# Altium PCB Final_PCB.PcbDoc (part 1 of 2)
Units mm, origin at the board's own origin, x right, y up, seen from the top; angles counter-clockwise.
Board outline 88.27 x 49.85 mm, 2 copper layers (Top Layer, Bottom Layer); 47 components, 63 nets, 231 pads, 57 vias.
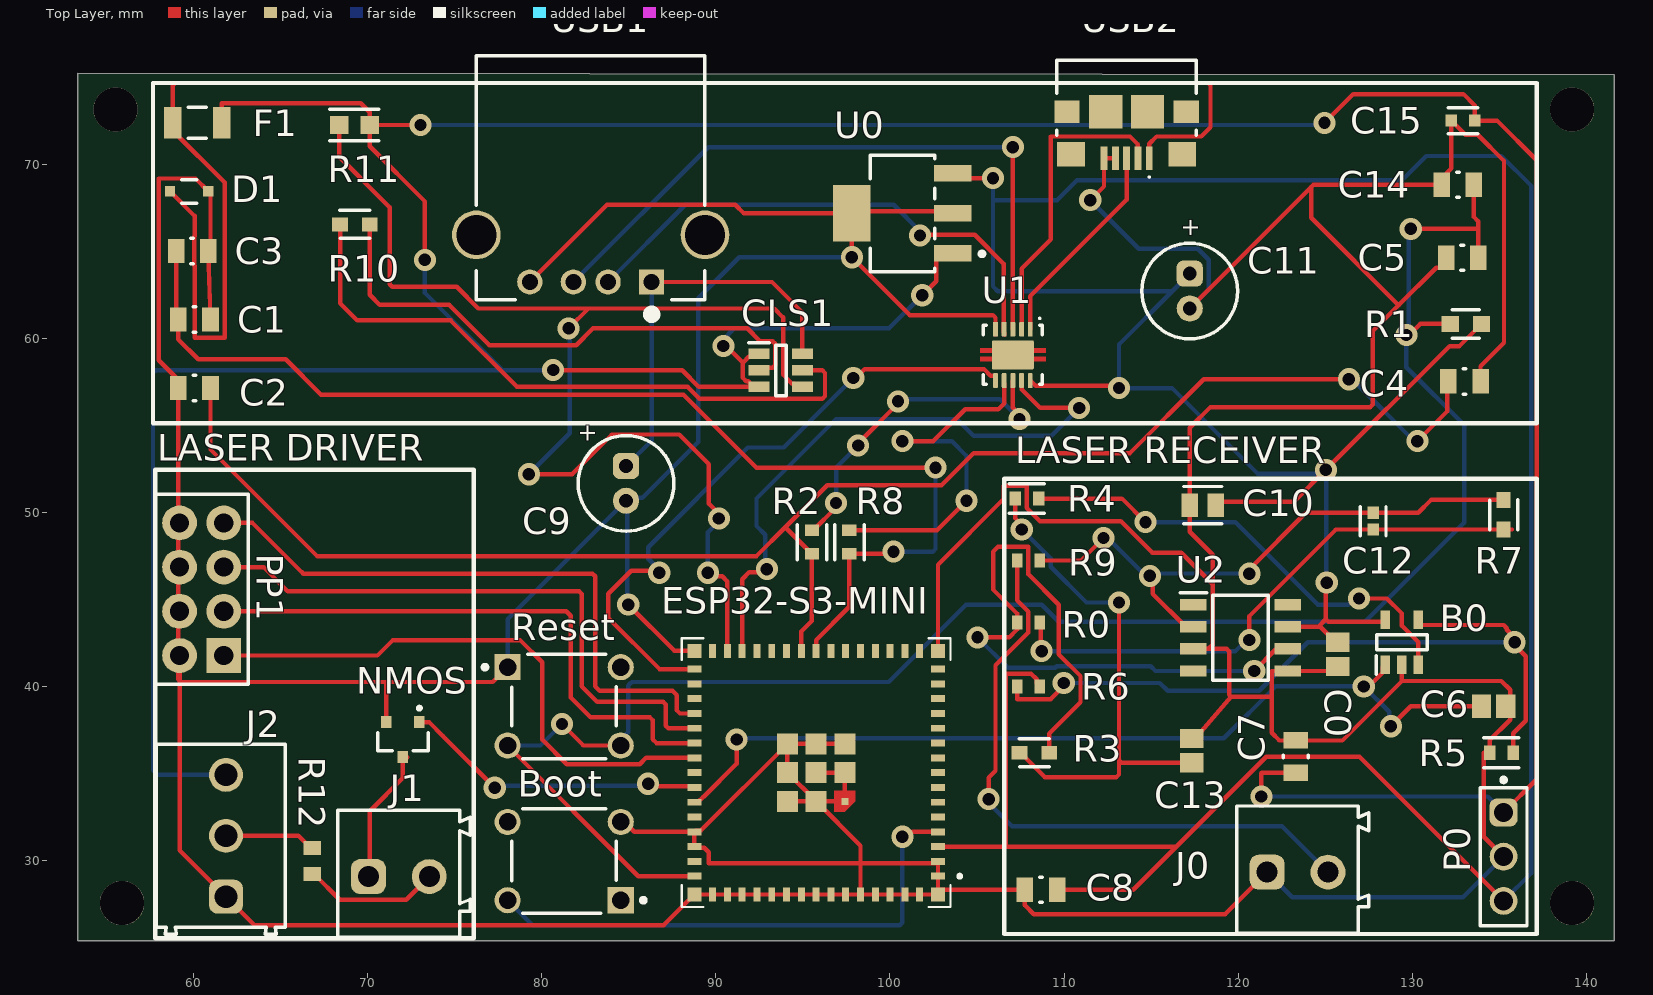
[diagram p0: Top Layer view]
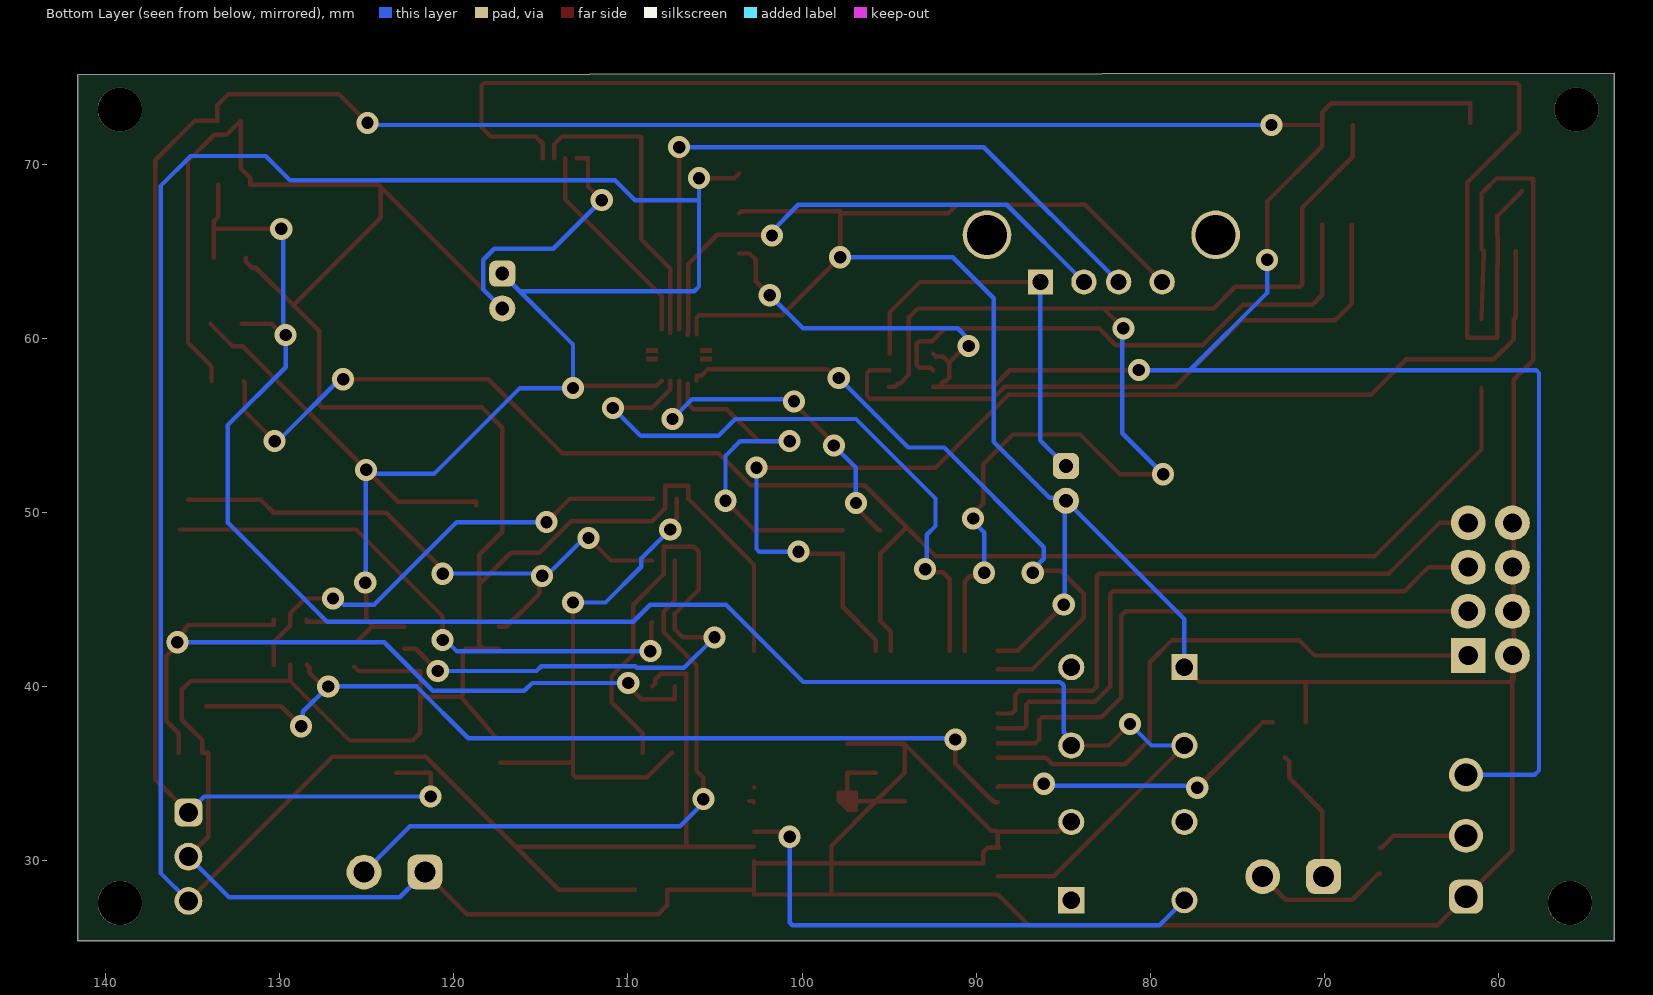
[diagram p1: Bottom Layer view, seen from below]
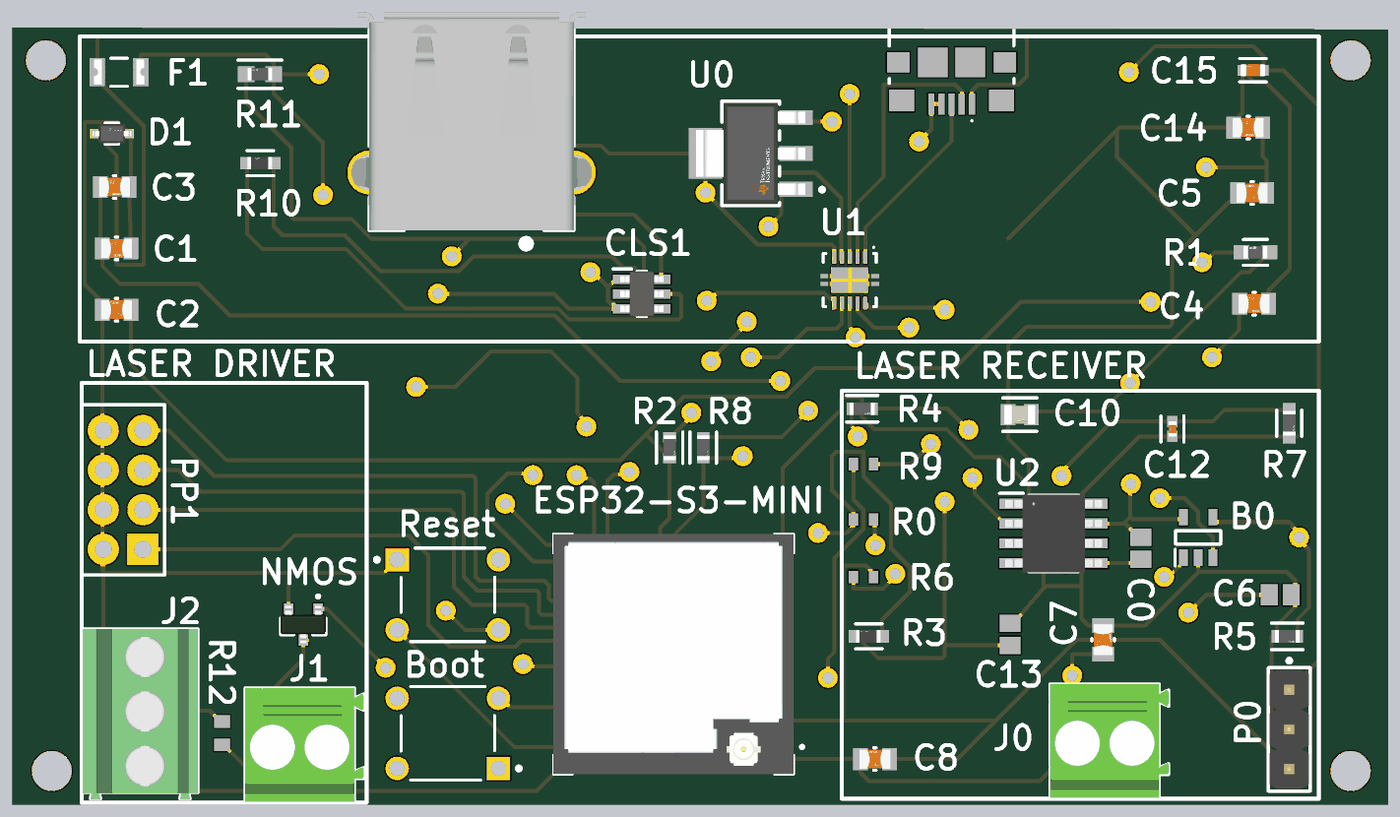
[diagram p2: 3D render of the assembled board from above, using the file's embedded part models]

## Layer stack, top to bottom
Top Solder: solder mask 0.0102, Solder Resist, Dk 3.5
Top Layer: signal copper 0.0356
Dielectric 1: dielectric 0.32, FR-4, Dk 4.8
Bottom Layer: signal copper 0.0356
Bottom Solder: solder mask 0.0102, Solder Resist, Dk 3.5

## Board outline
53.34,75.25 53.34,25.4 141.605,25.4 141.605,75.138

## Design rules (kind name [scope] priority, off if disabled: settings)
BoardOutlineClearance [All] p1 off: gap=0.2 ignorepadtopadclearanceinfootprint=FALSE
Clearance Clearance_1 [All] p1: gap=0.2 ignorepadtopadclearanceinfootprint=FALSE
Clearance "Min Clearance" [All] p2: gap=0.1 ignorepadtopadclearanceinfootprint=TRUE
DiffPairsRouting [All] p1: maxlimit=0.254 minlimit=0.2 mostfreqgap=0.254 toplayer_minwidth=0.254 toplayer_maxwidth=0.254 toplayer_prefwidth=0.254 bottomlayer_minwidth=0.254 bottomlayer_maxwidth=0.254 bottomlayer_prefwidth=0.254 maxuncoupledlength=12.7
HoleToHoleClearance [All] p1: gap=0.2 allowstackedmicrovias=TRUE
MinimumSolderMaskSliver [All] p1: minsoldermaskwidth=0.07
PolygonConnect [All] p1: connectstyle=Relief reliefconductorwidth=0.254 reliefentries=4 polygonreliefangle="90 Angle" airgapwidth=0.254
RoutingVias [All] p1: holewidth=0.711 width=1.27 viastyle="Through Hole" minholewidth=0.2 minwidth=0.25 maxholewidth=0.711 maxwidth=1.27
SilkToSilkClearance [All] p1: silktosilkclearance=0.1
SilkToSolderMaskClearance [IsPad] p1: minsilkscreentomaskgap=0.07 clearancetoexposedcopper=FALSE
SolderMaskExpansion [All] p1: expansion=0.102 istentingtop=FALSE
SupplyNets "Schematic Supply Nets_2" [InNet('5V')] p1: voltage=0.000
SupplyNets "Schematic Supply Nets_1" [InNet('GND')] p2: voltage=0.000
SupplyNets "Schematic Supply Nets" [InNet('3.3V')] p3: voltage=0.000
Width [All] p1: maxlimit=0.254 minlimit=0.1 preferedwidth=0.254 minimp=50.000000 maximp=50.000000 favimp=50.000000
25 further rules are at their usual default settings.

## Classes and differential pairs
component class "USB Schematic": C7 C8 C9 C11 C15 CLS1 D1 F1 R2 R8 R10 R11 U0 U1 USB1 USB2
component class "MCU Schematic": Boot C1 C2 C3 C4 C5 C14 ESP32-S3-MINI P0 PP1 R1 Reset
component class "Laser Schematic": B0 C0 C6 C10 C12 C13 J0 J1 J2 NMOS OPV310 R0 R3 R4 R5 R6 R7 R9 R12 U2
differential pair USB_D: +USB_D_P -USB_D_N
differential pair USB1_D: +USB1_D_P -USB1_D_N
differential pair USB0_D: +USB0_D_P -USB0_D_N

## Components (designator, comment, footprint, x,y, rotation, side; value= is the part's Value field where it differs from the comment)
B0 "LTC6752IS5#TRMPBF" SOT95P280X100-5N 129.413,42.545 r90 top
Boot "B3F-1000" OMRON-B3F-1000-4_V 81.28,29.972 r180 top (schematic designator BOOT)
C0 "08055F103KAT2A" CAPC2013X140X50LL20T25 125.73,41.848 r270 top
C1 "CC0805KKX7R7BB105" FP-CC0805-0_85-MFG 60.035,61.087 r0 top value="1 uF"
C2 "CC0805KKX7R7BB105" FP-CC0805-0_85-MFG 60.035,57.15 r180 top value="1 uF"
C3 "CC0805KRX7R9BB104" FP-CC0805-0_85-MFG 59.908,65.024 r0 top value="100 nF"
C4 "CC0805KRX7R9BB104" FP-CC0805-0_85-MFG 133.005,57.531 r0 top value="100 nF"
C5 "CC0805KRX7R9BB104" FP-CC0805-0_85-MFG 132.878,64.643 r180 top value="100 nF"
C6 "08055C103KAT2A" CAPC2013X140X50LL20T25 134.682,38.862 r0 top
C7 "CC0805KRX7R9BB104" FP-CC0805-0_85-MFG 123.317,35.977 r90 top value="100 nF"
C8 "CC0805KRX7R9BB104" FP-CC0805-0_85-MFG 108.676,28.321 r180 top value="100 nF"
C9 "860160272010" WCAP-ATLL_D5H11 -1185.164,1321.673 r90 top
C10 "CL21C102JBCNNNC" FP-C0805C-DN-MFG 117.971,50.419 r180 top value="1,000 pF"
C11 "KS336M016C07RR0VH2FP0" WCAP-ATLL_D5H11 -1152.779,1332.722 r90 top
C12 "GJM1555C1H2R0WB01D" FP-GJM155-0_05-IPC_A 127.762,49.501 r270 top
C13 "08055C103KAT2A" CAPC2013X140X50LL20T25 117.348,36.322 r270 top
C14 "CC0805KRX7R9BB104" FP-CC0805-0_85-MFG 132.624,68.834 r0 top value="100 nF"
C15 "CL10B474KA8NNNC" FP-GRM188-0_1-e0_2_0_5-MFG 132.929,72.517 r180 top
CLS1 "TPS2553DBVR" SOT95P280X145-6N 93.726,58.166 r0 top
D1 "PESD5V0S1BA,115" FP-SOD323-CA-MFG 59.733,68.453 r0 top
ESP32-S3-MINI "ESP32-S3-MINI-1U-N8" XCVR_ESP32-S3-MINI-1U-N8 95.757,35.053 r180 top
F1 "1206L050/15YR" FP-1206L-MFG 60.195,72.39 r180 top value=0.15-0.75Ω
J0 "691214110002S" 691214110002S 123.416,29.487 r0 top
J1 "691214110002S" 691214110002S 71.783,29.233 r0 top
J2 "691214110003" 691214110003 61.549,31.425 r90 top
NMOS "2N7002BK" TL431CDBZR215 72.009,36.957 r180 top
P0 "61300311121" 61300311121 135.255,30.226 r270 top
PP1 "C18723055" 2541FV-2×4P 61.722,41.783 r180 top
R0 "RC0603FR-1022RL" RESC1608X55X25LL10T15 107.95,43.688 r0 top
R1 "RN73C1J10KB" FP-RN731J-MFG 133.085,60.833 r180 top value=10KΩ
R2 "RC0603JR-0722RL" FP-RC0603-0_55-IPC_C 95.509,48.302 r270 top
R3 "RT0603BRE07200RL" FP-RT0603-MFG 108.292,36.195 r180 top value=200Ω
R4 "AC0603FR-101KL" FP-AC0603-IPC_C 107.865,50.8 r0 top
R5 "AC0603FR-101KL" FP-AC0603-IPC_C 135.128,36.195 r0 top
R6 "RC0603JR-1010KL" RESC1608X55X25LL10T15 107.95,40.005 r0 top
R7 "RT0603BRD0750KL" FP-RT0603-0_55-MFG 135.255,49.872 r270 top
R8 "RC0603JR-0722RL" FP-RC0603-0_55-IPC_C 97.663,48.302 r270 top
R9 "RC0603JR-07220RL" RESC1608X55X25LL10T15 107.95,47.244 r0 top
R10 "RCT0320KJLF" FP-RT0603-MFG 69.254,66.548 r180 top value=20KΩ
R11 "RCT03100KJLF" FP-AT0603-IPC_A 69.227,72.263 r180 top
R12 "RC0603FR-07560RL" RESC1608X55X25ML10T15 66.802,29.984 r90 top
Reset "B3F-1000" OMRON-B3F-1000-4_V 81.28,38.862 r0 top (schematic designator RESET)
U0 "LM3940IMPX-3.3/NOPB" FP-DCY0004A-MFG 100.711,67.183 r180 top
U1 "TS3USB221DRCR" DRC0010J_V 107.061,59.055 r270 top
U2 "LTC6268IS8-10#TRPBF" SOIC127P599X175-8N 120.142,42.799 r0 top
USB1 "292303-1" TE-292303-1_V 82.804,64.389 r180 top
USB2 "1981568-1" TECO-1981568-5_V 113.595,70.35 r180 top

## Footprints (in the part's own frame and the unit in brackets; to place one, negate y for a bottom-side part, rotate by r counter-clockwise, add the part's x,y. Pads: shape width x height; smd on the part's side, far side on the other; paste and mask are expansions set on the pad)
2541FV-2×4P [mm]
  rect 2x2 hole 1.1: 1(0,0)
  round 2 hole 1.1: 2(2.54,0) 3(0,-2.54) 4(2.54,-2.54) 5(0,-5.08) 6(2.54,-5.08) 7(0,-7.62) 8(2.54,-7.62)
  silkscreen extent -1.4,-9.27 3.94,1.65, body extent -1.4,-9.27 3.94,1.65, height 8.7
61300311121 [mm] "Pin Header, pitch 2.54 mm, THT, Vertical, single row, 3p"
  rrect50% 1.6x1.6 hole 1.1: 1(-2.54,0)
  round 1.6 hole 1.1: 2(0,0) 3(2.54,0)
  silkscreen extent -4.53,-1.34 3.96,1.34, body extent -3.81,-1.27 3.81,1.27, height 8.57
691214110002S [mm] "Serie 2141S - 3.50 mm _ 2 pins"
  rrect50% 2x2 hole 1.2: 1(-1.75,-0.15)
  round 2 hole 1.2: 2(1.75,-0.15)
  silkscreen extent -3.5,-3.65 4.1,3.65, body extent -3.5,-3.65 4.1,3.65, height 9.15
691214110003 [mm] "3.50 mm Horizontal Entry Modular, 3p"
  rrect50% 1.95x1.95 hole 1.3: 1(-3.5,-0.3)
  round 1.95 hole 1.3: 2(0,-0.3) 3(3.5,-0.3)
  silkscreen extent -5.65,-3.7 5.25,3.7, body extent -5.7,-3.7 5.25,3.7, height 8.55
CAPC2013X140X50LL20T25 [mm] "Chip Capacitor, 2-Leads, Body 2.00x1.25mm, IPC High Density"
  rect 1.1x1.35 smd: 1(-0.7,0) 2(0.7,0)
  body extent -1.1,-0.72 1.1,0.72, height 1.4
DRC0010J_V [mm] "SON, 10-Leads, Body 3x3mm, Pitch 0.5mm, Thermal Pad 2.4x1.65mm, TI Recommended"
  rrect36% 0.85x0.28 smd paste-0.025 mask+0.07: 1(-1.475,1) 2(-1.475,0.5) 3(-1.475,0) 4(-1.475,-0.5) 5(-1.475,-1) 6(1.475,-1) 7(1.475,-0.5) 8(1.475,0) 9(1.475,0.5) 10(1.475,1)
  rrect6% 1.65x2.4 smd paste-0.825 mask+0.07: 11(0,0)
  Top Layer region: -0.394,-1.9 -0.114,-1.9 -0.114,-1.2 -0.394,-1.2
  Top Layer region: 0.386,-1.2 0.106,-1.2 0.106,-1.9 0.386,-1.9
  Top Layer region: 0.386,1.9 0.106,1.9 0.106,1.2 0.386,1.2
  Top Layer region: -0.394,1.2 -0.114,1.2 -0.114,1.9 -0.394,1.9
  silkscreen extent -2.15,-1.7 1.7,1.7, body extent -1.55,-1.55 1.55,1.55, height 1
FP-1206L-MFG [mm]
  rect 1x1.8 smd paste+0 mask+0: 1(-1.4,0) 2(1.4,0)
  silkscreen extent -0.53,-0.9 0.53,0.9, body extent -2,-1 2,1, height 0.25
FP-AC0603-IPC_C [mm]
  rect 0.659x0.812 smd paste+0 mask+0: 1(-0.677,0) 2(0.677,0)
  silkscreen extent -1.01,-0.85 1.01,0.85, body extent -1.11,-0.55 1.11,0.55, height 0.25
FP-AT0603-IPC_A [mm]
  rect 1.059x1.012 smd paste+0 mask+0: 1(-0.877,0) 2(0.877,0)
  silkscreen extent -1.41,-0.91 1.41,0.91, body extent -1.91,-1.01 1.91,1.01, height 0.25
FP-C0805C-DN-MFG [mm]
  rect 0.95x1.35 smd paste+0 mask+0: 1(-0.75,0) 2(0.75,0)
  silkscreen extent -1.1,-1.07 1.1,1.07, body extent -1.4,-0.85 1.4,0.85, height 0.25
FP-CC0805-0_85-MFG [mm]
  rect 0.95x1.4 smd paste+0 mask+0: 1(-0.925,0) 2(0.925,0)
  silkscreen extent -0.07,-0.73 0.08,0.73, body extent -1.6,-1.05 1.6,1.05, height 0.25
FP-DCY0004A-MFG [mm]
  rect 2.15x0.95 smd paste+0 mask+0: 1(-2.9,2.3) 2(-2.9,0) 3(-2.9,-2.3)
  rect 2.15x3.25 smd paste+0 mask+0: 4(2.9,0)
  silkscreen extent -4.7,-3.35 1.85,3.35, body extent -4.08,-3.45 4.08,3.45, height 0.25
FP-GJM155-0_05-IPC_A [mm]
  rect 0.715x0.672 smd paste+0 mask+0: 1(-0.479,0) 2(0.479,0)
  silkscreen extent -0.84,-0.74 0.84,0.74, body extent -1.04,-0.54 1.04,0.54, height 0.25
FP-GRM188-0_1-e0_2_0_5-MFG [mm]
  rect 0.65x0.7 smd paste+0 mask+0: 1(-0.675,0) 2(0.675,0)
  silkscreen extent -0.85,-0.75 0.85,0.75, body extent -1.1,-0.55 1.1,0.55, height 0.25
FP-RC0603-0_55-IPC_C [mm]
  rect 0.659x0.812 smd paste+0 mask+0: 1(-0.677,0) 2(0.677,0)
  silkscreen extent -1.01,-0.85 1.01,0.85, body extent -1.11,-0.55 1.11,0.55, height 0.25
FP-RN731J-MFG [mm]
  rect 1x0.9 smd paste+0 mask+0: 1(-0.9,0) 2(0.9,0)
  silkscreen extent -0.78,-0.82 0.77,0.82, body extent -1.5,-0.55 1.5,0.55, height 0.25
FP-RT0603-0_55-MFG [mm]
  rect 0.9x0.8 smd paste+0 mask+0: 1(-0.85,0) 2(0.85,0)
  silkscreen extent -0.85,-0.81 0.86,0.8, body extent -1.4,-0.55 1.4,0.55, height 0.25
FP-RT0603-MFG [mm]
  rect 0.9x0.8 smd paste+0 mask+0: 1(-0.85,0) 2(0.85,0)
  silkscreen extent -0.85,-0.81 0.86,0.8, body extent -1.4,-0.55 1.4,0.55, height 0.25
FP-SOD323-CA-MFG [mm]
  rect 0.6x0.6 smd paste-1000 mask+0: 1(-1.1,0) 2(1.1,0)
  silkscreen extent -0.43,-0.67 0.43,0.67, body extent -1.53,-0.82 1.53,0.82, height 0.25
OMRON-B3F-1000-4_V [mm] "TH, 4-Leads, Body 6x6mm"
  rect 1.5x1.5 hole 1 paste-2539.97: 1(-3.25,2.25)
  round 1.5 hole 1 paste-2539.97: 2(3.25,2.25) 4(3.25,-2.25)
  round 1.5 hole 1 paste-2539.97 mask+0.102: 3(-3.25,-2.25)
  silkscreen extent -4.68,-3 3,3, body extent -3,-3 3,3, height 4.5
RESC1608X55X25LL10T15 [mm] "Chip Resistor, 2-Leads, Body 1.60x0.80mm, IPC High Density"
  rect 0.6x0.8 smd: 1(-0.65,0) 2(0.65,0)
  body extent -0.85,-0.45 0.85,0.45, height 0.55
RESC1608X55X25ML10T15 [mm] "Chip Resistor, 2-Leads, Body 1.70x0.90mm, IPC Low Density"
  rect 0.8x1 smd: 1(-0.75,0) 2(0.75,0)
  body extent -0.85,-0.45 0.85,0.45, height 0.55
SOIC127P599X175-8N [mm]
  rect 1.526x0.65 smd: 1(-2.712,1.905) 2(-2.712,0.635) 3(-2.712,-0.635) 4(-2.712,-1.905) 5(2.712,-1.905) 6(2.712,-0.635) 7(2.712,0.635) 8(2.712,1.905)
  silkscreen extent -3.48,-2.45 1.6,2.58, body extent -3.1,-2.5 3.1,2.5, height 1.76
SOT95P280X100-5N [mm]
  rect 1.05x0.55 smd: 1(-1.3,0.95) 2(-1.3,0) 3(-1.3,-0.95) 4(1.3,-0.95) 5(1.3,0.95)
  silkscreen extent -1.82,-1.45 0.42,1.47
SOT95P280X145-6N [mm]
  rect 1.2x0.6 smd: 1(-1.25,0.95) 2(-1.25,0) 3(-1.25,-0.95) 4(1.25,-0.95) 5(1.25,0) 6(1.25,0.95)
  silkscreen extent -1.85,-1.45 0.3,1.6, body extent -1.4,-1.45 1.4,1.45, height 1.2
TE-292303-1_V [mm] "THD, 4-Leads, Body 13.13x14mm, Pitch 2.5mm"
  rect 1.45x1.45 hole 0.92: 1(-3.5,1.144)
  round 1.45 hole 0.92: 2(-1,1.144) 3(1,1.144) 4(3.5,1.144)
  round 2.8 hole 2.3: 5(-6.57,-1.566) 6(6.57,-1.566)
  silkscreen extent -6.56,-11.85 6.56,3.25, body extent -8.12,-11.85 8.12,2.15, height 7.72
TECO-1981568-5_V [mm] "SMD, 5-Leads, Body 8x5.9mm, Pitch 0.65mm"
  rect 0.4x1.35 smd: 1(-1.3,0) 2(-0.65,0) 3(0,0) 4(0.65,0) 5(1.3,0)
  rect 1.6x1.4 smd: 6(-3.2,-0.225) 7(3.2,-0.225)
  rect 1.45x1.3 smd: 8(-3.425,-2.675) 9(3.425,-2.675)
  rect 1.9x1.9 smd: 10(-1.2,-2.675) 11(1.2,-2.675)
  silkscreen extent -4,-5.63 4,1.12, body extent -4,-5.63 4,0.28, height 3
TL431CDBZR215 [mm]
  rect 0.6x0.7 smd: 1(-0.95,-1) 2(0.95,-1) 3(0,1)
  silkscreen extent -1.45,-1.9 1.45,0.65, body extent -1.45,-1.2 1.45,1.2, height 0.95
WCAP-ATLL_D5H11 [mm] "Aluminum Electrolytic Capacitors, 5x11mm"
  rrect50% 1.5x1.5 hole 0.8: 1(-1269,-1270)
  round 1.5 hole 0.8: 2(-1271,-1270)
  silkscreen extent -1272.75,-1272.75 -1267.25,-1267.25, body extent -1272.49,-1272.5 -1267.5,-1267.5, height 11.31
XCVR_ESP32-S3-MINI-1U-N8 [mm]
  rect 0.8x0.4 smd: 1(-7,5.95) 2(-7,5.1) 3(-7,4.25) 4(-7,3.4) 5(-7,2.55) 6(-7,1.7) 7(-7,0.85) 8(-7,0) 9(-7,-0.85) 10(-7,-1.7) 11(-7,-2.55) 12(-7,-3.4) 13(-7,-4.25) 14(-7,-5.1) 15(-7,-5.95) 31(7,-5.95) 32(7,-5.1) 33(7,-4.25) 34(7,-3.4) 35(7,-2.55) 36(7,-1.7) 37(7,-0.85) 38(7,0) 39(7,0.85) 40(7,1.7) 41(7,2.55) 42(7,3.4) 43(7,4.25) 44(7,5.1) 45(7,5.95)
  rect 0.4x0.8 smd: 16(-5.95,-7) 17(-5.1,-7) 18(-4.25,-7) 19(-3.4,-7) 20(-2.55,-7) 21(-1.7,-7) 22(-0.85,-7) 23(0,-7) 24(0.85,-7) 25(1.7,-7) 26(2.55,-7) 27(3.4,-7) 28(4.25,-7) 29(5.1,-7) 30(5.95,-7) 46(5.95,7) 47(5.1,7) 48(4.25,7) 49(3.4,7) 50(2.55,7) 51(1.7,7) 52(0.85,7) 53(0,7) 54(-0.85,7) 55(-1.7,7) 56(-2.55,7) 57(-3.4,7) 58(-4.25,7) 59(-5.1,7) 60(-5.95,7)
  rect 0.4x0.4 smd paste-1 mask+0: 61_1(-1.65,1.65)
  rect 1.2x1.2 smd: 61_2(0,1.65) 61_3(1.65,1.65) 61_4(-1.65,0) 61_5(0,0) 61_6(1.65,0) 61_7(-1.65,-1.65) 61_8(0,-1.65) 61_9(1.65,-1.65)
  rect 0.8x0.8 smd: 62(-7,7) 63(-7,-7) 64(7,-7) 65(7,7)
  round 0 all layers, no hole mask+0: 66_1(-0.825,1.65) 66_2(0.825,1.65) 66_3(-1.65,0.825) 66_4(0,0.825) 66_5(1.65,0.825) 66_6(-0.825,0) 66_7(0.825,0) 66_8(-1.65,-0.825) 66_9(0,-0.825) 66_10(1.65,-0.825) 66_11(-0.825,-1.65) 66_12(0.825,-1.65)
  Top Layer region: -1.05,1.05 -2.25,1.05 -2.25,1.65 -1.65,2.25 -1.05,2.25
  silkscreen extent -8.35,-7.72 7.72,7.72, body extent -7.7,-7.7 7.7,7.7, height 2.55

## Part data
B0: "LINEAR TECHNOLOGY - LTC6752IS5#TRMPBF - Analogue Comparator, Single, High Speed, 1 Comparator, 3.4 ns, 2.45V to 3.5V, TSOT-23, 5 Pins", Manufacturer_Name="Analog Devices", Mouser Part Number=584-LTC6752IS5TRMPBF, Datasheet Link=https://datasheet.datasheetarchive.com/originals/distributors/DKDS-14/269585.pdf, Geometry.Height=1mm, Manufacturer_Part_Number=LTC6752IS5#TRMPBF, Mouser Price/Stock=https://www.mouser.co.uk/ProductDetail/Analog-Devices/LTC6752IS5TRMPBF?qs=hVkxg5c3xu9c5xiGZDI2qQ%3D%3D
Boot Reset: library part CMP-1677-00002-1, "Tactile Switch, SPST-NO, 0.05 A, 5 to 24 V, -25 to 70 degC, 4-Pin THD, RoHS, Bulk", Capacitance="-45 f", Current Rating="1.5 A", Max Operating Temperature="70 degC", Min Operating Temperature="-40 degC", Package Quantity=1080, Voltage Rating="150 V", ComponentLink1Description="Manufacturer URL", ComponentLink1URL=http://www.omron.com/, ComponentLink2Description=Datasheet, ComponentLink2URL=http://www.omron.com/ecb/products/pdf/en-b3f.pdf, Contact Material=Brass, Contact Plating=Gold, DatasheetVersion=Jan-15, Gender=Female, Height="14.99 mm", Lead Pitch="1.27 mm", Length="18.34 mm", Mount="Through Hole", PackageDescription="4-Pin Through Hole Device, Body 6 x 6 mm", PackageReference=B3F-1000, Packaging=Tray, Pins=8, Radiation Hardening=No, RoHSCompliant=true, Shielding=Shielded, Width="25.4 mm"
C0: library part CMP-2007-04788-1, Manufacturer="AVX Interconnect / Elco", Part Number=08055F103KAT2A
C1 C2: library part CMP-03422-000001-1, "CAP CER 1UF 16V X7R 0805", Capacitance="1 uF", Manufacturer=Yageo, Package=CC0805-0.85, Temperature="-30°C to +85°C", Temperature Characteristic=X7R, Temperature Range High=+85°C, Temperature Range Low=-30°C, Tolerance=0.1, Voltage Rating="16 V", Automotive=No, Category=Cap, ComponentLink2Description=Datasheet, ComponentLink2URL=http://www.yageo.com/documents/recent/UPY-GPHC_Y5V_6.3V-to-50V_8.pdf, Device Class L1="Passive Components", Device Class L2=Capacitors, Device Class L3="Ceramic Capacitors", Digikey Description="CAP CER 1UF 16V X7R 0805", Footprint Url=http://www.yageo.com/exep/pages/download/literatures/UPY-C_GEN_24.pdf, Height=0.95mm, Ipc Land Pattern Name=CAPC200125X85, Lead Free=Yes, Manufacturer Part Number=CC0805KKX7R7BB105, Material=Ceramic, Mouser Description="Multilayer Ceramic Capacitors MLCC - SMD/SMT 1.0uF 16V X7R 10%", Octopart=https://octopart.com/cc0805kkx7r7bb105-yageo-8376555, RoHS=TRUE
C3 C4 C5 C7 C8 C14: library part CMP-2100-03606-3, "CAP CER 0.1UF 50V X7R 0805", Capacitance="100 nF", Manufacturer=Yageo, Package=CC0805-0.85, Temperature="-30°C to +85°C", Temperature Characteristic=X7R, Temperature Range High=+85°C, Temperature Range Low=-30°C, Tolerance=0.1, Voltage Rating="50 V", Automotive=No, Category=Cap, ComponentLink2Description=Datasheet, ComponentLink2URL=http://www.yageo.com/documents/recent/UPY-GPHC_Y5V_6.3V-to-50V_8.pdf, Device Class L1="Passive Components", Device Class L2=Capacitors, Device Class L3="Ceramic Capacitors", Digikey Description="CAP CER 0.1UF 50V X7R 0805", Footprint Url=http://www.yageo.com/exep/pages/download/literatures/UPY-C_GEN_24.pdf, Height=0.95mm, Ipc Land Pattern Name=CAPC200125X85, Lead Free=Yes, Manufacturer Part Number=CC0805KRX7R9BB104, Material=Ceramic, Mouser Description="Multilayer Ceramic Capacitors MLCC - SMD/SMT 100nF 50V X7R 10%", Octopart=https://octopart.com/cc0805krx7r9bb104-yageo-192993, RoHS=TRUE
C6 C13: library part CMP-2007-04788-1, Manufacturer="AVX Interconnect / Elco", Part Number=08055F103KAT2A
C9: library part CMP-03913-54007380-1, "860160272010 Cap, 120Uf, 10V, Alu Elec, Radial Rohs Compliant: Yes", Capacitance=120µF, Case/Package=Radial, Leakage Current=12µA, Max Operating Temperature=105°C, Min Operating Temperature=-55°C, Ripple Current=246mA, Tolerance=20%, Voltage Rating=10V, Diameter=5mm, Height - Seated (Max)=12.4968mm, Impedance=1.02Ω, Lead Pitch=2.0066mm, Length=11mm, Life (Hours)=3000hours, Mount="Through Hole", NexarPartId=54007380, Packaging="Tape & Box (TB)", Pitch=2mm, Polarity=Polar, RoHS=Compliant
C10: library part CMP-03020-033764-1, "C0805 1,000 pF X7R 30ppm/°C 5.00% 50 V", Capacitance="1,000 pF", Manufacturer=KEMET, Manufacturer Part Number=C0805C102J5RAC, Package=C0805C-DN, Temperature="-55°C to +125°C", Temperature Characteristic=X7R, Temperature Coefficient=30ppm/°C, Temperature Range High=+125°C, Temperature Range Low=-55°C, Tolerance=0.05, Voltage Rating="50 V", Automotive=No, Category=Cap, ComponentLink2Description=Datasheet, ComponentLink2URL=https://content.kemet.com/datasheets/KEM_C1003_C0G_SMD.pdf, Device Class L1="Passive Components", Device Class L2=Capacitors, Device Class L3="Ceramic Capacitors", Height=0.88mm, Ipc Land Pattern Name=CAPC200125X78, Lead Free=Yes, Material=Ceramic, Mouser Description="Multilayer Ceramic Capacitors MLCC - SMD/SMT 50volts 1000pF 5% X7R", Octopart=https://octopart.com/c0805c102j5rac-kemet-1343162, RoHS=TRUE
C11: library part CMP-03913-54007416-1, "860160372005 Aluminium Electrolytic Capacitor-Leaded Rohs Compliant: Yes", Capacitance=33µF, Case/Package=Radial, Leakage Current=5.28µA, Max Operating Temperature=105°C, Min Operating Temperature=-55°C, Ripple Current=144mA, Tolerance=20%, Voltage Rating=16V, Diameter=5mm, Height - Seated (Max)=12.4968mm, Impedance=2Ω, Lead Pitch=2.0066mm, Length=11mm, Life (Hours)=4000hours, Mount="Through Hole", NexarPartId=54007416, Packaging="Tape & Box (TB)", Pitch=2mm, Polarity=Polar, RoHS=Compliant
C12: library part CMP-2008-03832-2, "Multi-Layer Ceramic Capacitor 2pF C0G  ±0.05pF 0402 Paper T/R", Capacitance=2pF, Case Code (Imperial)=0402, Case Code (Metric)=1005, Dielectric=C0G, Max Operating Temperature=125°C, Min Operating Temperature=-55°C, Package Quantity=10000, Voltage Rating=50V, Case/Package=0402, Depth=0.5mm, Height=0.5mm, Lead Free="Lead Free", Length=1mm, Mount="Surface Mount", Packaging="Tape and Reel", Radiation Hardening=No, Termination=SMD/SMT, Thickness=0.022inch, Voltage Rating (DC)=50V, Width=0.02inch
C15: library part CMP-2006-02563-2, "25V 470nF X7R ±10% 0603 Multilayer Ceramic Capacitors MLCC - SMD/SMT ROHS", Capacitance=470nF, Case Code (Imperial)=0603, Case Code (Metric)=1608, Dielectric=X7R, Max Operating Temperature=125°C, Min Operating Temperature=-55°C, Package Quantity=10000, Tolerance=10%, Voltage Rating=16V, Case/Package=0603, Depth=0.8mm, Height=0.8mm, Length=1.6mm, Mount="Surface Mount", Packaging="Tape and Reel", Radiation Hardening=No, Termination=SMD/SMT, Thickness=0.035inch, Voltage Rating (DC)=16V, Width=0.031inch
CLS1: "Integrated Circuit", Manufacturer_Name="Texas Instruments", Mouser Part Number=595-TPS2553DBVR, Arrow Part Number=TPS2553DBVR, Arrow Price/Stock=https://www.arrow.com/en/products/tps2553dbvr/texas-instruments?utm_currency=USD&region=europe, Datasheet Link=http://www.ti.com/lit/gpn/tps2553, Height=1.45mm, Manufacturer_Part_Number=TPS2553DBVR, Mouser Price/Stock=https://www.mouser.co.uk/ProductDetail/Texas-Instruments/TPS2553DBVR?qs=QZKT0uTfj2LY8QSfRgrLvA%3D%3D
D1: library part CMP-14432-000001-1, "TVS DIODE 5V 14V SOD323"
ESP32-S3-MINI: "Bluetooth, WiFi 802.11b/g/n, Bluetooth v5.0 Transceiver Module 2.4GHz Antenna Not Included, U.FL Surface Mount", Package="VFQFN-56 Espressif Systems", Check_prices=https://www.snapeda.com/parts/ESP32-S3-MINI-1U-N8/Espressif+Systems/view-part/?ref=eda, MF="Espressif Systems", MP=ESP32-S3-MINI-1U-N8, SnapEDA_Link=https://www.snapeda.com/parts/ESP32-S3-MINI-1U-N8/Espressif+Systems/view-part/?ref=snap
F1: library part CMP-08606-000030-1, "PTC RESET FUSE 15V 500MA 1206", Ambient Temperature Range High=+85°C, Ambient Temperature Range Low=-40°C, Current Rating=100A, Hold Current=0.5A, Manufacturer="Littelfuse Inc", Package=1206L, Resistance=0.15-0.75Ω, Temperature="-40°C to +85°C", Trip Current=1A, Voltage Rating=15V, Automotive=No, Category=Fuse, ComponentLink2Description=Datasheet, ComponentLink2URL=https://www.littelfuse.com/~/media/electronics/datasheets/resettable_ptcs/littelfuse_ptc_1206l_datasheet.pdf.pdf, Device Class L1="Circuit Protection", Device Class L2="PTC Resettable Fuses", Device Class L3=unset, Digikey Description="PTC RESET FUSE 15V 500MA 1206", Height=0.75mm, Lead Free=Yes, Manufacturer Part Number=1206L050/15YR, Mouser Description="Resettable Fuses - PPTC 15V 1206 .500A POLYFUSE", Octopart=https://octopart.com/1206l050%2F15yr-littelfuse-673645, RoHS=TRUE, Temperature Range High=+85°C, Temperature Range Low=-40°C, Trip Time=0.1s
J0 J1: library part CMP-1502-02465-2, Current Rating=10A, Max Operating Temperature=120°C, Min Operating Temperature=-30°C, Voltage Rating=300V, Contact Material="Nickel, Tin", Height=9.2mm, Lead Pitch=3.5mm, NexarPartId=94172715, Number of Contacts=2, Number of Pins=2, Number of Rows=1, Packaging=Box
J2: library part CMP-1502-02466-2, Color="Blue, Green", Current=10A, Max Operating Temperature=105°C, Min Operating Temperature=-40°C, Voltage=300V, Contact Material=Brass, Contact Plating="Brass, Tin", Current Rating=10A, Height=12.2mm, Housing Material=Nylon, Lead Pitch=3.5mm, Length=7.4mm, Mount="Through Hole", NexarPartId=18818289, Number of Contacts=3, Number of Levels=1, Number of Pins=3, Number of Positions Per Level=3, Packaging=Box, Pitch=3.5052mm, Plating="Brass, Steel", REACH SVHC=Unknown, RoHS=Compliant, Stripping Length=-6mm, Termination=Screw, Voltage Rating=300V, Width=10.9mm, Wire Gauge (Max)=24AWG, Wire Gauge (Min)=16AWG, Wire/Cable Gauge=24AWG
NMOS: "MOSFET (N-Channel)", Manufacturer_Name=Nexperia, Mouser Part Number=N/A, Datasheet Link=https://componentsearchengine.com/Datasheets/2/2N7002BK.pdf, Height=1.1mm, Manufacturer_Part_Number=2N7002BK, Mouser Price/Stock=https://www.mouser.co.uk/ProductDetail/Nexperia/2N7002BK?qs=vHuUswq2%252Bsy7zq%252BdG1DqyA%3D%3D
P0: library part CMP-1502-01062-3, Color=Black, Contact Resistance=20mΩ, Current Rating=3A, Max Operating Temperature=105°C, Min Operating Temperature=-40°C, Operating Supply Voltage=250V, Connector Type="Male Pin", Contact Material=Copper, Contact Mating Length=5.9944mm, Contact Plating=Gold, Gender=Male, Height=8.94mm, Lead Free="Lead Free", Lead Pitch=2.54mm, Mount="Through Hole", NexarPartId=32855521, Number of Contacts=3, Number of Pins=3, Number of Positions=3, Number of Rows=1, Orientation=Vertical, Packaging=Bulk, Pitch=2.54mm, REACH SVHC=Unknown, RoHS=Compliant, Termination=Solder, Voltage Rating=250V
PP1: library part 2541FV-2x4P, "-40℃~+105℃ 2 2.54mm 2.54mm 2x4P 3A 8P Square Hole Through Hole Top Plugin,P=2.54mm Female Headers ROHS"
R0: library part CMP-2000-04180-1, Manufacturer=Yageo, Part Number=RC0603FR-1022RL
R1: library part CMP-03211-006130-1, "Thin Film Resistors RN 0603 10KΩ 0.1% 10ppm/°C", Manufacturer="TE Connectivity", Package=RN731J, Power Rating=0.063W, Resistance=10KΩ, Temperature="-55°C to +155°C", Temperature Coefficient=10ppm/°C, Temperature Range High=+155°C, Temperature Range Low=-55°C, Tolerance=0.1%, Voltage Rating=50V, Automotive=No, Category=Res, ComponentLink2Description=Datasheet, ComponentLink2URL=https://www.te.com/commerce/DocumentDelivery/DDEController?Action=showdoc&DocId=Data+Sheet%7F1773270%7FP%7Fpdf%7FEnglish%7FENG_DS_1773270_P.pdf%7F9-1614352-9, Composition="Thin Film", Device Class L1="Passive Components", Device Class L2=Resistors, Device Class L3="Chip SMD Resistors", Height=0.55mm, Ipc Land Pattern Name=RESC15580X45, Lead Free=Yes, Manufacturer Part Number=RN73C1J10KB, Octopart=https://octopart.com/rn73c1j10kb-te+connectivity-47108040, octopart_url=https://octopart.com/rn73c1j10kb-te+connectivity-47108040, RoHS=TRUE, Series=RN73
R2 R8: library part CMP-03412-037819-1, "RES SMD 22 OHM 5% 1/10W 0603", Case Code (Imperial)=0603, Case Code (Metric)=1608, Max Operating Temperature=155°C, Max Power Dissipation=100mW, Min Operating Temperature=-55°C, Resistance=22R, Resistance Tolerance=5%, Resistor Type="Thick Film", Temperature Coefficient=100ppm/°C, Voltage Rating=50V, Case/Package=0603, Construction=Rectangular, Depth=0.8mm, Features="Moisture Resistant", Lead Free="Lead Free", Length=1.6mm, Military Standard=Not, Number of Pins=2, Number of Terminations=2, Packaging="Tape and Reel", Power Rating=100mW, REACH SVHC="No SVHC", RoHS Compliant=Yes, Series=RC, Size Code=0603, Termination=SMD/SMT, Tolerance=5%, Voltage Rating (DC)=50V, Width=0.8mm
R3: library part CMP-03412-013175-1, "RES SMD 200 OHM 0.1% 1/10W 0603", Manufacturer=Yageo, Package=RT0603, Power Rating=0.1W, Resistance=200Ω, Temperature="-55°C to +155°C", Temperature Coefficient="50 ppm/°C", Temperature Range High=+155°C, Temperature Range Low=-55°C, Tolerance=0.001, Voltage Rating=75V, Automotive=No, Category=Res, ComponentLink2Description=Datasheet, ComponentLink2URL=http://www.yageo.com/documents/recent/PYu-RT_1-to-0.01_RoHS_L_9.pdf, Composition="Thin Film", Device Class L1="Passive Components", Device Class L2=Resistors, Device Class L3="Chip SMD Resistors", Digikey Description="RES SMD 200 OHM 0.1% 1/10W 0603", Footprint Url=http://www.yageo.com/exep/pages/download/literatures/PYu-R_Mount_10.pdf, Height=0.55mm, Ipc Land Pattern Name=RESC16080X45, Lead Free=Yes, Manufacturer Part Number=RT0603BRE07200RL, Octopart=https://octopart.com/rt0603bre07200rl-yageo-1413156, RoHS=TRUE, Series=RT
R4 R5: library part CMP-03412-045511-1, "RES 1kΩ 1.00% 0.1W 0603", Case Code (Imperial)=0603, Case Code (Metric)=1608, Max Operating Temperature=155°C, Min Operating Temperature=-55°C, Power Rating=100mW, Resistance=1kR, Temperature Coefficient=100ppm/°C, Tolerance=1%, Voltage Rating=50V, Case/Package=0603, Height=0.45mm, Length=1.6mm, Packaging="Tape and Reel", RoHS Compliant=Yes, Series=AC, Termination=SMD/SMT, Width=0.8mm
R6: library part CMP-2000-04303-1, Manufacturer=Yageo, Part Number=RC0603JR-1010KL
R7: library part CMP-03412-048226-1, "RES 50K OHM 0.1% 1/10W 0603"
R9: library part CMP-1012-00058-2, "Chip Resistor, 220 Ohm, +/- 5%, 0.1 W, -55 to 155 degC, 0603 (1608 Metric), RoHS, Tape and Reel", Case Code - in=0603, Case Code - mm=1608, Manufacturer=Yageo, Operating Temperature Range=-55Cto+155C, Package Description="2-Pin Surface Mount Device, Body 1.6 x 0.8 mm", Power Rating=100mW, Resistance=220Ohms, Temperature Coefficient=100PPM/C, Tolerance=5%, Voltage Rating=50V, Datasheet URL=http://www.yageo.com/documents/recent/PYu-RC_Group_51_RoHS_L_7.pdf, Datasheet Version="Rev. 7, 05/2017", Manufacturer URL=http://www.yageo.com/, Mounting Technology=SurfaceMount, Package Reference=0603, Packaging=Reel, Product=ThickFilmResistorsGeneralPurpose, Series=RC, Termination Style=SMD/SMT
R10: library part CMP-03412-021202-1, "RT0603 20KΩ 0.1W 25 ppm/°C 0.10%", Manufacturer=Yageo, Manufacturer Part Number=RT0603BRD1320KL, Package=RT0603, Power Rating=0.1W, Resistance=20KΩ, Temperature="-55°C to +155°C", Temperature Coefficient="25 ppm/°C", Temperature Range High=+155°C, Temperature Range Low=-55°C, Tolerance=0.001, Voltage Rating=75V, Automotive=No, Category=Res, ComponentLink2Description=Datasheet, ComponentLink2URL=http://www.yageo.com/documents/recent/PYu-RT_1-to-0.01_RoHS_L_9.pdf, Composition="Thin Film", Device Class L1="Passive Components", Device Class L2=Resistors, Device Class L3="Chip SMD Resistors", Footprint Url=http://www.yageo.com/exep/pages/download/literatures/PYu-R_Mount_10.pdf, Height=0.55mm, Ipc Land Pattern Name=RESC16080X45, Lead Free=Yes, Mouser Description="Thin Film Resistors 1/10W 20K ohm .1% 25ppm", Octopart=https://octopart.com/rt0603brd1320kl-yageo-84795393, RoHS=TRUE, Series=RT
R11: library part CMP-03412-044027-1, "-55℃~+155℃ 100kΩ 100mW 75V Thick Film Resistor ±100ppm/℃ ±5% 0603 Chip Resistor - Surface Mount ROHS", RoHS Compliant=Yes
R12: library part CMP-1659-00038-1, "Chip Resistor, 560 Ohm, +/- 1%, 0.1 W, -55 to 155 degC, 0603 (1608 Metric), RoHS, Tape and Reel", Case Code (Imperial)=0603, Case Code (Metric)=1608, Max Operating Temperature="155 degC", Min Operating Temperature="-55 degC", Power Rating="100 mW", Resistance="820 Ohm", Tolerance=1%, Voltage Rating="50 V", Case\Package=0603, ComponentLink1Description="Manufacturer URL", ComponentLink1URL=http://www.yageo.com/, ComponentLink2Description=Datasheet, ComponentLink2URL=http://www.yageo.com/documents/recent/PYu-RC_Group_51_RoHS_L_04.pdf, DatasheetVersion="Rev. 4, 02/2016", Height="0.45 mm", Length="1.6 mm", Mount="Surface Mount", PackageDescription="2-Pin Surface Mount Device, Body 1.6 x 0.8 mm", PackageReference=0603, Packaging="Tape and Reel", Pins=2, REACH SVHC="No SVHC", RoHSCompliant=true, Voltage Rating (DC)="50 V", Width="0.8 mm"
U0: library part CMP-04917-000180-1, "IC REG LINEAR 3.3V 1A SOT223-4", Case/Package=SOT-223, Dropout Voltage=500mV, Max Input Voltage=7.5V, Max Operating Temperature=125°C, Max Output Current=1A, Min Input Voltage=4.5V, Min Operating Temperature=-40°C, Output Voltage=3.3V, Package Quantity=2000, Quiescent Current=15mA, Contact Plating=Tin, Lead Free="Lead Free", Mount="Surface Mount", Number Of Outputs=1, Number of Pins=4, Number of Regulators=1, Output Current=1A, Output Type=Fixed, Packaging="Tape and Reel", Polarity=Positive, Radiation Hardening=No, RoHS Compliant=Yes
U1: library part CMP-0309-00084-2, "High-Speed USB 2.0 (480 Mbps) 1:2 Multiplexer / Demultiplexer Switch with Single Enable, 6 ohm RON, 2.5 to 3.3V, -40 to 85 degC, 10-Pin SON (DRC), Green (RoHS & no Sb/Br)", Manufacturer="Texas Instruments", Architecture="\"1\",\"2 mux/demux\"", Bandwidth(MHz)=1200, Charge Injection(Max)(pC)=N/A, ComponentLink1Description=Datasheet, ComponentLink1URL=http://www.ti.com/general/docs/lit/getliterature.tsp?genericPartNumber=TS3USB221&fileType=pdf, ComponentLink2Description="Package Specification", ComponentLink2URL=http://www.ti.com/litv/pdf/mpds117k, DatasheetVersion=SCDS220G, Eco-Plan="Green (RoHS & no Sb/Br)", ESD HBM(kV)=+/-2, ICC(uA)=30, IL OFF(Max)(nA)=2, Mounting Technology="Surface Mount", Number of Channels=2, OFF Time(Max)(ns)=12, ON Time(Max)(ns)=30, PackageDescription="10-Pin Plastic Small Outline No-Lead, 3 x 3 x 1 mm Body, 0.5 mm Pitch, Exposed Pad", PackageReference=DRC0010J, PackageVersion="revL, Sep-2011", PartNumber=TS3USB221DRCR, RON Flatness(Max)(Ohms)=1, RON Mis-match(Max)(Ohms)=0.2, ron(max)(ohms)=6, SubFamily="USB Switch", tpd max(ns)=0.25, Vcc range(V)="2.3 to 3.6"
U2: "Integrated Circuit", Manufacturer_Name="Analog Devices", Mouser Part Number=584-C6268IS8-10TRPBF, Arrow Part Number=LTC6268IS8-10#TRPBF, Arrow Price/Stock=https://www.arrow.com/en/products/ltc6268is8-10trpbf/analog-devices?utm_currency=USD&region=nac, Datasheet Link=https://www.analog.com/media/en/technical-documentation/data-sheets/626810f.pdf, Height=1.752mm, Manufacturer_Part_Number=LTC6268IS8-10#TRPBF, Mouser Price/Stock=https://www.mouser.co.uk/ProductDetail/Analog-Devices/LTC6268IS8-10TRPBF?qs=oahfZPh6IALedkwOOQIbIw%3D%3D
USB1: library part CMP-2000-05404-1, "1 Port Right Angle Through Hole Mount Female Type A USB Connector, 4 Position, -55 to 85 degC, RoHS, Tube", Manufacturer="TE Connectivity", Package Description="4-Pin Through Hole Device, Body 14 x 13.13 mm, Pitch 2.5 mm", Connector Mounting=PCB, Connector Type=USBA, Contact Material=Copper, Contact Plating=Gold, Contact Termination Type=Solder, Datasheet URL=http://www.farnell.com/cad/1653030.pdf, Datasheet Version=Feb-12, Gender=Receptacle, Manufacturer URL=http://www.te.com/, No. of Contacts=4, Package Reference=292303-1, SVHC=NoSVHC(16-Jun-2014)
USB2: library part CMP-2000-05408-1, "Micro USB Receptacle Standard Type B Assy, 5-Pin SMD, RoHS, Tape and Reel", Current Rating (Max)=1/ContactA, Manufacturer="TE Connectivity", Operating Temp Range=-55Cto85C, Operating Temperature Max Deg. C=85C, Operating Temperature Min Deg. C=-55C, Voltage Rating Max=30VAC, Body Orientation=RightAngle, Contact Material=CopperAlloy, Contact Plating=GoldOverNickel, Datasheet URL=http://www.mouser.com/ds/2/418/NG_CD_1981568_E2-621296.pdf, Datasheet Version="Rev. E2, 08/2015", Gender=RCP, Housing Material=Thermoplastic, Manufacturer URL=http://www.te.com/, Mounting Style=SurfaceMount, Number of Contacts=5POS, Number of Ports=1Port, Number of Terminals=5, Packaging=TapeandReel, Pitch (mm)=0.65mm, Product Depth (mm)=5.6mm, Product Height (mm)=3mm, Product Length (mm)=8mm, Termination Method=Solder, Type=MicroUSB

## Free pads (board coordinates)
  round 2.54 hole 2.54: 2(55.499,73.152) 2(55.88,27.559) 2(139.192,27.559) 2(139.192,73.152)

## Via types
v1: diameter 1.27, hole 0.711, Top Layer to Bottom Layer, 57 vias

## Nets (pads, with @x,y where several pads share a name; then routed paths per layer and width w, separated by ;. In a path a pad name is that pad's centre, name@x,y a point inside that pad or via, vN(x,y) a via of type N, cw(c..) or ccw(c..) an arc to the next point about the centre after c; other vN are vias at no path point)
3.3V: B0.5 C0.1 C8.1 C10.1 C11.1 ESP32-S3-MINI.3 P0.3 R1.1 R6.2 U0.3 U1.10 U2.7 | length 214.8
  Top Layer w0.254: ESP32-S3-MINI.3 106.655,30.803 ; U0.3 103.879,69.215 v1(105.918,69.215) ; U1.10 108.364,57.277 113.03,57.277 v1(113.157,57.15) ; R6.2 108.427,40.178 108.427,40.417 108.102,40.742 106.655,40.742 106.655,30.803 ; C8.1 113.97,28.321 116.452,30.803 ; C10.1 118.721,50.622 123.215,50.622 v1(125.044,52.451) 132.156,59.563 132.715,59.563 R1.1 ; U2.7 124.719,43.434 125.605,42.548 C0.1 ; 124.616,43.434 125.044,43.862 ; v1(125.095,45.974) 125.044,45.923 125.044,43.862 ; B0.5 128.463,43.713 125.193,43.713 125.044,43.862 ; P0.3 126.975,35.966 121.615,35.966 116.452,30.803 ; 106.655,30.803 116.452,30.803
  Bottom Layer w0.254: v1(105.918,69.215) 105.918,67.945 ; C11.1 116.212,62.713 ; v1@124.828,52.235 121.12,52.235 116.205,57.15 v1(113.157,57.15) 113.157,59.658 116.212,62.713 ; v1(125.044,52.451) 125.07,52.426 125.07,45.999 v1(125.095,45.974) ; P0.3 136.852,29.283 136.852,68.761 135.128,70.485 130.81,70.485 129.413,69.088 110.744,69.088 109.601,67.945 105.918,67.945 ; 105.918,67.945 105.918,62.988 106.194,62.713 116.212,62.713
5V: C7.1 C15.1 CLS1.1 CLS1.3 F1.1 J2.3 P0.1 R11.1 U0.1 | length 236.7
  Top Layer w0.254: F1.1 61.595,73.508 69.596,73.508 70.104,73 R11.1 ; v1(73.025,72.263) R11.1 ; v1(73.279,64.516) 73.279,67.869 70.104,71.044 R11.1 ; v1(80.645,58.185) 80.664,58.166 88.069,58.166 89.019,57.216 CLS1.3@92.176,57.216 ; v1(90.424,59.563) 90.587,59.563 91.549,58.601 ; CLS1.3 CLS1.3@92.176,57.216 ; CLS1.1 92.303,58.943 91.891,58.943 91.549,58.601 ; v1(101.854,62.484) 102.663,63.293 102.663,64.535 103.011,64.883 U0.1 ; v1(121.336,33.68) 121.336,35.027 121.361,35.052 C7.1 ; v1(124.968,72.39) 126.619,74.041 132.947,74.041 133.604,73.384 C15.1 134.874,72.517 137.16,70.231 137.16,34.671 P0.1 ; 91.549,58.601 91.549,57.731 91.741,57.539 91.853,57.539 CLS1.3@92.176,57.216
  Bottom Layer w0.254: J2.3 57.912,34.925 57.658,35.179 57.658,58.017 57.807,58.166 77.724,58.166 ; v1(73.025,72.263) 124.714,72.263 124.841,72.39 v1(124.968,72.39) ; v1(73.279,64.516) 73.279,62.611 77.724,58.166 ; v1(80.645,58.185) 80.626,58.166 77.724,58.166 ; v1(90.424,59.563) 90.424,59.944 91.059,60.579 99.949,60.579 v1(101.854,62.484) ; v1(121.336,33.68) 134.341,33.68 P0.1
GND: B0.2 Boot.3 C0.2 C1.2 C2.2 C3.2 C4.2 C5.2 C6.2 C7.2 C8.2 C9.2 C10.2 C11.2 C13.1 C14.1 C15.2 D1.2 ESP32-S3-MINI.1 ESP32-S3-MINI.2 ESP32-S3-MINI.42 ESP32-S3-MINI.43 ESP32-S3-MINI.46 ESP32-S3-MINI.47 ESP32-S3-MINI.48 ESP32-S3-MINI.49 ESP32-S3-MINI.50 ESP32-S3-MINI.51 ESP32-S3-MINI.52 ESP32-S3-MINI.53 ESP32-S3-MINI.54 ESP32-S3-MINI.55 ESP32-S3-MINI.56 ESP32-S3-MINI.57 ESP32-S3-MINI.58 ESP32-S3-MINI.59 ESP32-S3-MINI.60 ESP32-S3-MINI.61_1 ESP32-S3-MINI.61_2 ESP32-S3-MINI.61_3 ESP32-S3-MINI.61_4 ESP32-S3-MINI.61_5 ESP32-S3-MINI.61_6 ESP32-S3-MINI.61_7 ESP32-S3-MINI.61_8 ESP32-S3-MINI.61_9 ESP32-S3-MINI.62 ESP32-S3-MINI.63 ESP32-S3-MINI.64 ESP32-S3-MINI.65 J0.1 J2.1 NMOS.2 P0.2 PP1.2 PP1.4 PP1.6 PP1.8 R5.1 Reset.1 U0.2 U0.4 U1.5 U2.3 U2.5 USB1.4 USB2.4 USB2.5 | length 459.4
  Top Layer w0.254: PP1.8@59.11,49.403 59.11,40.408 59.259,40.259 70.993,40.259 ; PP1.2 59.182,30.592 J2.1 63.485,26.289 86.993,26.289 ESP32-S3-MINI.65 ESP32-S3-MINI.46 ESP32-S3-MINI.47 ESP32-S3-MINI.48 ESP32-S3-MINI.49 ESP32-S3-MINI.50 ESP32-S3-MINI.51 ESP32-S3-MINI.52 ESP32-S3-MINI.53 ESP32-S3-MINI.54 ESP32-S3-MINI.55 ESP32-S3-MINI.56 ; PP1.8 59.11,49.475 59.11,57.633 57.988,58.754 57.988,69.19 60.096,69.19 D1.2 60.96,68.326 60.96,65.151 C3.2 C1.2 ; NMOS.2 71.059,40.193 70.993,40.259 ; Reset.1 77.177,40.259 70.993,40.259 ; USB1.4 83.741,67.682 91.11,67.682 91.609,67.183 U0.4 ; Boot.3 84.733,32.222 85.302,31.653 ESP32-S3-MINI.42 ; v1(84.963,44.704) 87.614,42.053 ESP32-S3-MINI.64 ; ESP32-S3-MINI.43@88.702,30.748 ESP32-S3-MINI.43 ESP32-S3-MINI.42 ; ESP32-S3-MINI.43@88.821,30.739 89.324,30.739 89.583,30.48 89.583,29.845 98.307,29.845 ; ESP32-S3-MINI.61_3 ESP32-S3-MINI.61_2 ; ESP32-S3-MINI.61_5 ESP32-S3-MINI.61_4 ESP32-S3-MINI.61_1 ESP32-S3-MINI.61_2 ; ESP32-S3-MINI.61_7 ESP32-S3-MINI.61_8 ESP32-S3-MINI.61_9 ; ESP32-S3-MINI.62@102.757,28.321 C8.2 107.751,27.432 108.259,26.924 119.253,26.924 J0.1 ; ESP32-S3-MINI.2 ESP32-S3-MINI.2@102.757,29.845 ; ESP32-S3-MINI.63 102.757,47.004 106.528,50.775 106.528,51.533 107.848,51.533 107.848,50.267 108.617,49.498 113.267,49.498 115.079,47.685 116.729,47.685 118.542,45.872 ; U0.2 103.495,67.299 97.811,67.299 U0.4 ; U1.5@106.048,60.232 106.061,60.245 U1.5 106.061,61.192 105.912,61.341 101.134,61.341 v1(97.811,64.664) U0.4 ; v1(111.506,67.945) 112.295,68.734 USB2.5 USB2.4 ; C11.2 124.206,68.707 ; U2.3 118.288,42.164 ; C13.1@117.574,37.039 117.896,37.417 119.598,39.415 ; C0.2 125.476,40.894 U2.5 121.939,40.894 121.939,39.415 ; B0.2 129.413,40.318 ; C5.2 131.953,64.418 131.605,64.07 131.38,64.07 129.222,61.912 ; C15.2 C15.2@132.254,72.492 ; C4.2 133.93,58.409 135.28,59.759 135.28,70.199 133.775,71.704 133.067,71.704 132.477,72.294 132.452,72.294 C15.2@132.254,72.492 ; P0.2 134.112,31.369 134.112,36.195 R5.1 134.451,36.915 135.636,38.1 135.636,39.81 135.128,40.318 129.413,40.318 ; ESP32-S3-MINI.42 88.83,31.726 89.13,31.726 ESP32-S3-MINI.61_9 ; ESP32-S3-MINI.61_9 ESP32-S3-MINI.61_6 ESP32-S3-MINI.61_2 ; ESP32-S3-MINI.61_2 98.307,30.853 98.307,29.845 ; ESP32-S3-MINI.56 98.307,29.845 ; ESP32-S3-MINI.56 ESP32-S3-MINI.57 ESP32-S3-MINI.58 ESP32-S3-MINI.59 ESP32-S3-MINI.60 ESP32-S3-MINI.62 ESP32-S3-MINI.1 ESP32-S3-MINI.2@102.757,29.845 ; 98.307,29.845 ESP32-S3-MINI.2@102.757,29.845 ; 118.288,42.164 119.338,42.164 119.486,42.015 119.486,39.527 119.598,39.415 ; 118.288,42.164 118.542,42.418 118.542,45.872 ; 118.542,45.872 118.542,47.574 117.221,48.895 C10.2 117.221,54.864 118.415,56.058 127.588,56.058 127.737,56.207 127.737,60.427 129.222,61.912 ; 119.598,39.415 121.939,39.415 ; 121.939,39.415 121.939,37.338 122.375,36.902 C7.2 125.997,36.902 129.413,40.318 ; 124.206,68.707 124.333,68.834 C14.1 131.699,69.215 132.254,69.77 C15.2@132.254,72.492 ; 124.206,68.707 124.206,66.929 129.222,61.912
  Bottom Layer w0.254: Reset.1 78.03,43.867 C9.2 ; v1(84.963,44.704) 84.9,44.767 84.9,50.346 84.836,50.409 C9.2 ; v1(97.811,64.664) 91.334,64.664 88.976,62.306 88.976,54.051 85.763,50.838 85.001,50.838 C9.2 ; v1(111.506,67.945) 114.3,65.151 117.678,65.151 118.313,64.516 118.313,62.814 C11.2 ; J0.1 123.114,27.889 132.918,27.889 P0.2
GPIO1: ESP32-S3-MINI.5
GPIO2: ESP32-S3-MINI.6 | length 0.3
  Top Layer w0.254: ESP32-S3-MINI.6 102.83,33.426 ESP32-S3-MINI.6@103.03,33.426
GPIO3: ESP32-S3-MINI.7 | length 0
  Top Layer w0.254: ESP32-S3-MINI.7@102.753,34.207 ESP32-S3-MINI.7
GPIO4: ESP32-S3-MINI.8
GPIO5: ESP32-S3-MINI.9
GPIO6: ESP32-S3-MINI.10
GPIO7: ESP32-S3-MINI.11
GPIO8: ESP32-S3-MINI.12
GPIO9: ESP32-S3-MINI.13
GPIO10: ESP32-S3-MINI.14
GPIO11: ESP32-S3-MINI.15
GPIO12: ESP32-S3-MINI.16
GPIO13: ESP32-S3-MINI.17
GPIO14: ESP32-S3-MINI.18
GPIO15: ESP32-S3-MINI.19
GPIO16: ESP32-S3-MINI.20
GPIO17: ESP32-S3-MINI.21
GPIO18: ESP32-S3-MINI.22
GPIO21: ESP32-S3-MINI.25
GPIO26: ESP32-S3-MINI.26
GPIO33: ESP32-S3-MINI.28 U1.9 | length 35.8
  Top Layer w0.254: ESP32-S3-MINI.28 91.507,46.168 91.914,46.575 92.758,46.575 v1(92.93,46.747) ; U1.9 107.574,57.567 107.574,57.069 108.636,56.007 v1(110.871,56.007)
  Bottom Layer w0.254: v1(92.93,46.747) 92.837,46.84 92.837,48.717 92.329,49.225 92.329,50.804 96.897,55.372 103.84,55.372 104.802,54.41 109.274,54.41 v1(110.871,56.007)
GPIO34: CLS1.4 ESP32-S3-MINI.29 R11.2 | length 73.5
  Top Layer w0.254: R11.2 68.351,70.435 71.247,67.539 71.247,63.115 71.396,62.967 75.105,62.967 76.349,61.722 82.677,61.722 ; v1(79.248,52.197) 81.736,52.197 84.022,54.483 87.884,54.483 89.595,52.772 89.595,50.507 90.17,49.932 v1(90.17,49.657) ; v1(81.534,60.579) 82.677,61.722 ; v1(89.535,46.536) 89.729,46.342 90.357,46.342 90.657,46.042 ESP32-S3-MINI.29 ; CLS1.4 94.676,57.216 94.503,57.389 94.391,57.389 93.857,57.922 93.857,61.21 93.345,61.722 82.677,61.722
  Bottom Layer w0.254: v1(79.248,52.197) 81.607,54.556 81.607,60.506 v1(81.534,60.579) ; v1(89.535,46.536) 89.535,48.855 90.17,49.49 v1(90.17,49.657)
GPIO35: ESP32-S3-MINI.31 U1.6 | length 37.4
  Top Layer w0.254: v1(86.741,46.536) 86.62,46.657 85.138,46.657 83.82,45.339 83.82,43.942 86.759,41.003 ESP32-S3-MINI.31 ; v1(97.888,57.731) 98.037,57.731 98.545,58.239 105.402,58.239 105.778,57.863 106.048,57.863 106.061,57.85 U1.6
  Bottom Layer w0.254: v1(86.741,46.536) 86.741,46.703 86.106,47.338 86.106,48.006 91.833,53.733 93.89,53.733 v1(97.888,57.731)
GPIO36: ESP32-S3-MINI.32
GPIO37: ESP32-S3-MINI.33
GPIO38: ESP32-S3-MINI.34 PP1.7 | length 35.8
  Top Layer w0.254: PP1.7 63.373,49.403 66.22,46.556 66.294,46.482 82.909,46.482 83.058,46.333 83.058,40.006 83.313,39.751 87.503,39.751 87.757,39.497 87.757,38.63 87.934,38.453 ESP32-S3-MINI.34
GPIO39: ESP32-S3-MINI.35 PP1.5 | length 34.7
  Top Layer w0.254: PP1.5 64.008,46.863 65.405,45.466 82.147,45.466 82.296,45.317 82.296,40.005 83.185,39.116 86.973,39.116 87.122,38.967 87.122,37.741 87.271,37.592 88.746,37.592 ESP32-S3-MINI.35
GPIO40: ESP32-S3-MINI.36 PP1.3 | length 33.6
  Top Layer w0.254: PP1.3 81.407,44.323 81.661,44.069 81.661,39.37 82.804,38.227 86.211,38.227 86.36,38.078 86.36,36.979 86.586,36.753 ESP32-S3-MINI.36
GPIO41: ESP32-S3-MINI.37 PP1.1 | length 33.1
  Top Layer w0.254: PP1.1 70.552,41.783 71.441,42.672 78.74,42.672 80.013,41.399 80.013,36.954 81.432,35.535 85.618,35.535 85.986,35.903 ESP32-S3-MINI.37
GPIO42: ESP32-S3-MINI.38
GPIO45: ESP32-S3-MINI.41
GPIO46: ESP32-S3-MINI.44
GPIO47: ESP32-S3-MINI.27
GPIO48: ESP32-S3-MINI.30
NetB0_3: B0.3 R4.2 | length 27.2
  Top Layer w0.254: R4.2 113.325,50.8 v1(114.681,49.444) ; v1(126.949,45.06) 128.549,45.06 129.413,44.196 129.413,43.495 130.363,42.545 B0.3
  Bottom Layer w0.254: v1(114.681,49.444) 119.847,49.444 124.587,44.704 126.319,44.704 126.674,45.06 v1(126.949,45.06)
NetB0_4: B0.4 R5.2 R6.1 | length 44.5
  Top Layer w0.254: R6.1 107.3,39.268 109.224,39.268 109.982,40.026 v1(109.982,40.205) ; B0.4 130.363,43.536 135.264,43.536 135.444,43.356 135.444,43.266 135.89,42.82 135.89,42.378 136.525,41.743 136.525,38.033 135.805,37.313 R5.2
  Bottom Layer w0.254: v1(109.982,40.205) 115.506,40.205 115.96,39.751 121.209,39.751 124.003,42.545 v1(135.89,42.545)
NetBoot_2: Boot.2 ESP32-S3-MINI.4 | length 30.4
  Top Layer w0.254: v1(100.711,31.369) 100.986,31.369 101.27,31.653 ESP32-S3-MINI.4
  Bottom Layer w0.254: Boot.2 79.463,26.289 100.562,26.289 100.711,26.438 v1(100.711,31.369)
NetC5_1: C5.1 C14.2 ESP32-S3-MINI.45 R1.2 Reset.3 Reset.4 | length 107
  Top Layer w0.254: Reset.3 85.539,29.103 ESP32-S3-MINI.45 ; v1(81.153,37.846) 82.387,36.612 Reset.4 ; v1(129.667,60.198) 129.834,60.198 130.469,60.833 R1.2 ; v1(129.921,66.294) 133.803,66.294 ; C14.2 133.549,66.98 133.803,66.726 133.803,66.294 ; C5.1 133.803,66.294
  Bottom Layer w0.254: Reset.3 79.919,36.612 v1(81.153,37.846) ; Reset.4 84.53,36.949 84.963,37.382 84.963,39.972 84.963,40.034 84.992,40.09 cw(c85.217,39.972) 85.085,40.189 ccw(c84.53,41.112) 85.188,40.259 99.924,40.259 104.369,44.704 108.721,44.704 109.703,43.722 127.288,43.722 132.988,49.422 132.988,55.026 129.667,58.347 v1(129.667,60.198) 129.794,60.325 129.794,66.167 v1(129.921,66.294)
NetC9_1: C9.1 CLS1.6 USB1.1 | length 22.9
  Top Layer w0.254: USB1.1 93.219,63.245 94.967,61.497 CLS1.6@94.967,59.116
  Bottom Layer w0.254: C9.1 86.304,54.141 USB1.1
NetC12_1: C12.1 R7.1 R9.2 U2.2 | length 34.3
  Top Layer w0.254: R9.2 110.976,47.244 v1(112.268,48.536) ; v1(114.935,46.355) 115.087,46.203 115.087,45.339 116.992,43.434 U2.2 ; v1(120.65,46.482) 120.65,46.736 123.893,49.979 C12.1 130.347,49.979 131.089,50.722 R7.1
  Bottom Layer w0.254: v1(112.268,48.536) 112.511,48.536 114.692,46.355 v1(114.935,46.355) 115.076,46.496 120.636,46.496 v1(120.65,46.482)
NetC12_2: C12.2 R0.2 R7.2 | length 32.4
  Top Layer w0.254: R0.2 108.656,43.632 108.656,42.093 v1(108.712,42.037) ; v1(120.65,42.672) 120.65,44.05 125.622,49.022 135.738,49.022
  Bottom Layer w0.254: v1(108.712,42.037) 119.848,42.037 120.483,42.672 v1(120.65,42.672)
NetC13_2: C13.2 R3.2 R4.1 | length 30
  Top Layer w0.254: R4.1 107.188,49.678 107.569,49.297 v1(107.569,49.022) ; R3.2 107.492,36.195 108.889,34.798 113.008,34.798 113.157,34.947 v1(113.157,44.831) ; 113.157,35.771 113.306,35.622 C13.2
  Bottom Layer w0.254: v1(107.569,49.022) 109.229,47.362 109.229,46.89 111.289,44.831 v1(113.157,44.831)
NetCLS1_2: CLS1.2 R10.1 | length 31.6
  Top Layer w0.254: R10.1 70.104,62.509 70.688,61.925 74.676,61.925 76.984,59.617 81.976,59.617 82.938,60.579 91.796,60.579 92.532,59.842 93.254,59.842 93.403,59.694 93.403,58.467 93.254,58.319 92.629,58.319 CLS1.2
NetCLS1_5: CLS1.5 R10.2 | length 37.4
  Top Layer w0.254: R10.2 68.404,62.025 69.393,61.036 74.752,61.036 78.565,57.223 88.37,57.223 89.052,56.54 96.117,56.54 96.266,56.689 96.266,58.017 96.117,58.166 CLS1.5
NetD1_1: D1.1 F1.2 USB2.1 | length 93.3
  Top Layer w0.254: D1.1 60.046,67.04 60.046,65.874 60.031,65.859 60.031,64.189 60.046,64.174 60.046,60.046 61.773,60.046 61.773,68.961 58.795,71.939 F1.2 58.795,74.527 58.944,74.676 118.266,74.676 118.415,74.527 118.415,72.136 117.881,71.603 115.316,71.603 114.895,71.182 USB2.1
NetJ0_2: J0.2 R9.1 | length 36.3
  Top Layer w0.254: v1(105.664,33.528) 105.664,34.763 106.064,35.163 106.064,41.218 107.95,43.104 107.95,44.308 107.3,44.958 R9.1
  Bottom Layer w0.254: v1(105.664,33.528) 105.664,33.327 107.012,31.979 122.524,31.979 J0.2
NetJ1_1: J1.1 NMOS.3 | length 7.7
  Top Layer w0.254: J1.1@70.104,29.123 70.104,32.842 72.009,34.747 72.009,35.687 NMOS.3@72.263,35.941
NetJ1_2: J1.2 R12.1 | length 7.9
  Top Layer w0.254: R12.1 66.902,29.234 68.38,27.756 72.206,27.756 J1.2
NetJ2_2: J2.2 R12.2 | length 5.2
  Top Layer w0.254: J2.2 66.011,31.425 66.702,30.734 R12.2
NetR0_1: R0.1 R3.1 U2.6 | length 42.7
  Top Layer w0.254: v1(105.029,42.824) 106.846,42.824 107.3,43.278 R0.1 107.3,44.196 105.921,45.575 105.921,47.752 106.204,48.035 107.944,48.035 107.953,48.025 107.953,46.454 109.703,44.704 109.703,41.845 110.944,40.603 110.944,39.093 109.142,37.291 R3.1 ; v1(120.929,40.894) 122.199,42.164 U2.6
  Bottom Layer w0.254: v1(105.029,42.824) 106.778,41.075 109.492,41.075 109.584,41.167 114.982,41.167 115.255,40.894 v1(120.929,40.894)
NetR2_1: R2.1 U1.8 | length 19.4
  Top Layer w0.254: R2.1 95.586,48.978 96.901,50.294 v1(96.901,50.546) ; v1(98.171,53.848) 98.171,53.975 100.457,56.261 v1(100.457,56.388) ; U1.8 107.061,56.028 107.442,55.647 v1(107.442,55.372)
  Bottom Layer w0.254: v1(96.901,50.546) 96.901,52.578 v1(98.171,53.848) ; v1(100.457,56.388) 100.584,56.515 106.299,56.515 v1(107.442,55.372)
NetR8_1: R8.1 U1.7 | length 21.9
  Top Layer w0.254: R8.1 102.699,48.978 v1(104.394,50.673) ; v1(100.711,54.102) 102.489,54.102 104.326,55.939 106.231,55.939 106.561,56.269 U1.7@106.561,57.404
  Bottom Layer w0.254: v1(100.711,54.102) 103.543,54.102 104.394,53.251 v1(104.394,50.673)
RXD0: B0.1 C6.1 ESP32-S3-MINI.40 | length 52.8
  Top Layer w0.254: ESP32-S3-MINI.40 88.957,33.353 89.28,33.676 89.292,33.676 91.186,35.57 v1(91.186,36.957) ; v1(127.223,40.005) 127.417,40.199 127.702,40.199 128.315,40.812 128.315,41.097 B0.1 ; v1(128.778,37.719) 129.921,38.862 C6.1@134.236,38.862